# EAGLE board 8LPerspex (EAGLE 6.6.0)

Size 471.49 x 209.55 mm. Coordinates in mm from the lower left corner, seen from the top.
Outline: 0,7.94 0,201.61 arc-90 7.94,209.55 463.55,209.55 arc-90 471.49,201.61 471.49,7.94 arc-90 463.55,0 7.94,0 arc-90 0,7.94
Outline: 408.78,46.04 408.78,23.81 423.86,23.81 423.86,46.04 408.78,46.04
Outline: 330.2,46.04 330.2,23.81 403.62,23.81 403.62,46.04 330.2,46.04
Outline: 308.77,46.04 308.77,23.81 323.85,23.81 323.85,46.04 308.77,46.04
Outline: 130.18,46.04 130.18,23.81 302.42,23.81 302.42,46.04 130.18,46.04
Outline: 73.03,46.04 73.03,23.81 88.11,23.81 88.11,46.04 73.03,46.04
Outline: 94.46,46.04 94.46,23.81 123.83,23.81 123.83,46.04 94.46,46.04
Copper layers (1+16): Top 0.035mm / dielectric 1.5mm / Bottom 0.035mm
Design rules "15mils *": minimum track width 15mil, minimum drill 24mil, track to track 15mil, track to pad 10mil, pad to pad 10mil, via to via 10mil, smd to smd 10mil, copper to edge 25mil, drill to drill 10mil, minimum pad ring 10mil, minimum via ring 8mil, stop-mask expansion 0mil, vias tented up to drill 0mil, thermal gap 10mil
Net classes: 1 supply: width 0.762 mm
Holes 19.84 mm at 45.24,36.51

## Footprints (pad centres in the part's own frame; a part is rotated, then mirrored left to right if it is on the bottom)
BULB = drill 1.422 octagon: A 0,0; B 0,2.54

## Placement (x,y rotation side)
AC0  [BULB]  136.53,79.77 0 top
AC1  [BULB]  150.81,79.77 0 top
AC2  [BULB]  165.1,79.77 0 top
AC3  [BULB]  179.39,79.77 0 top
AC4  [BULB]  193.68,79.77 0 top
AC5  [BULB]  207.96,79.77 0 top
AC6  [BULB]  222.25,79.77 0 top
AC7  [BULB]  236.54,79.77 0 top
AC8  [BULB]  250.82,79.77 0 top
AC9  [BULB]  265.11,79.77 0 top
AC10  [BULB]  279.4,79.77 0 top
AC11  [BULB]  293.69,79.77 0 top
BREAK  [BULB]  393.7,102 0 top
CA  [BULB]  379.41,102 0 top
DEFER  [BULB]  350.84,102 0 top
EXECUTE  [BULB]  336.55,102 0 top
FETCH  [BULB]  322.26,102 0 top
IF2  [BULB]  122.24,124.22 0 top
ION  [BULB]  322.26,79.77 0 top
IR0  [BULB]  350.84,124.22 0 top
IR1  [BULB]  336.55,124.22 0 top
IR2  [BULB]  322.26,124.22 0 top
LINK  [BULB]  122.24,79.77 0 top
MA0  [BULB]  136.53,124.22 0 top
MA1  [BULB]  150.81,124.22 0 top
MA2  [BULB]  165.1,124.22 0 top
MA3  [BULB]  179.39,124.22 0 top
MA4  [BULB]  193.68,124.22 0 top
MA5  [BULB]  207.96,124.22 0 top
MA6  [BULB]  222.25,124.22 0 top
MA7  [BULB]  236.54,124.22 0 top
MA8  [BULB]  250.82,124.22 0 top
MA9  [BULB]  265.11,124.22 0 top
MA10  [BULB]  279.4,124.22 0 top
MA11  [BULB]  293.69,124.22 0 top
MB0  [BULB]  136.53,102 0 top
MB1  [BULB]  150.81,102 0 top
MB2  [BULB]  165.1,102 0 top
MB3  [BULB]  179.39,102 0 top
MB4  [BULB]  193.68,102 0 top
MB5  [BULB]  207.96,102 0 top
MB6  [BULB]  222.25,102 0 top
MB7  [BULB]  236.54,102 0 top
MB8  [BULB]  250.82,102 0 top
MB9  [BULB]  265.11,102 0 top
MB10  [BULB]  279.4,102 0 top
MB11  [BULB]  293.69,102 0 top
PAR  [BULB]  336.55,79.77 0 top
PROT  [BULB]  350.84,79.77 0 top
RUN  [BULB]  365.12,79.77 0 top
WC  [BULB]  365.12,102 0 top

## Library data of the parts
AC0 AC1-AC11 BREAK CA DEFER EXECUTE FETCH IF2 ION IR0 IR1 IR2 LINK MA0 MA1-MA11 MB0 MB1-MB11 PAR PROT RUN WC = dec-con

## Nets
N$6: IF2.B
N$19: MA0.B
N$20: MA1.B
N$21: MA2.B
N$22: MA3.B
N$24: MA5.B
N$25: MA6.B
N$26: MA7.B
N$27: MA8.B
N$28: MA9.B
N$29: MA10.B
N$30: MA11.B
N$31: MB0.B
N$32: MB1.B
N$33: MB2.B
N$34: MB3.B
N$35: MB4.B
N$36: MB5.B
N$37: MB6.B
N$38: MB7.B
N$39: MB8.B
N$40: MB9.B
N$41: MB10.B
N$42: MB11.B
N$43: AC0.B
N$44: AC1.B
N$45: AC2.B
N$46: AC3.B
N$47: AC4.B
N$48: AC5.B
N$49: AC6.B
N$50: AC7.B
N$51: AC8.B
N$52: AC9.B
N$53: AC10.B
N$54: AC11.B
N$72: LINK.B
N$73: ION.B
N$74: PAR.B
N$75: RUN.B
N$76: FETCH.B
N$77: EXECUTE.B
N$78: DEFER.B
N$79: WC.B
N$80: CA.B
N$81: BREAK.B
N$82: IR0.B
N$83: IR2.B
N$84: IR1.B

## Text on the board
tPlace: MEMORY ADDRESS | INSTRUCTION | EA | MEMORY BUFFER | MAJOR STATES | F | E | D | WC | CA | B | ACCUMULATOR | LINK | ION | PAR | PROT | RUN
Document: 1/8" Thick Plastic Stock | 1/4" Bulb aperture | Fonts and lettering are inaccurate/missing.